# Altium PCB CH32X035G8R-R0-1v1.PcbDoc
Units mil, origin at the board's own origin, x right, y up, seen from the top; angles counter-clockwise.
Board outline 1535.59 x 1780 mil, 2 copper layers (Top Layer, Bottom Layer); 29 components, 40 nets, 147 pads, 149 vias.
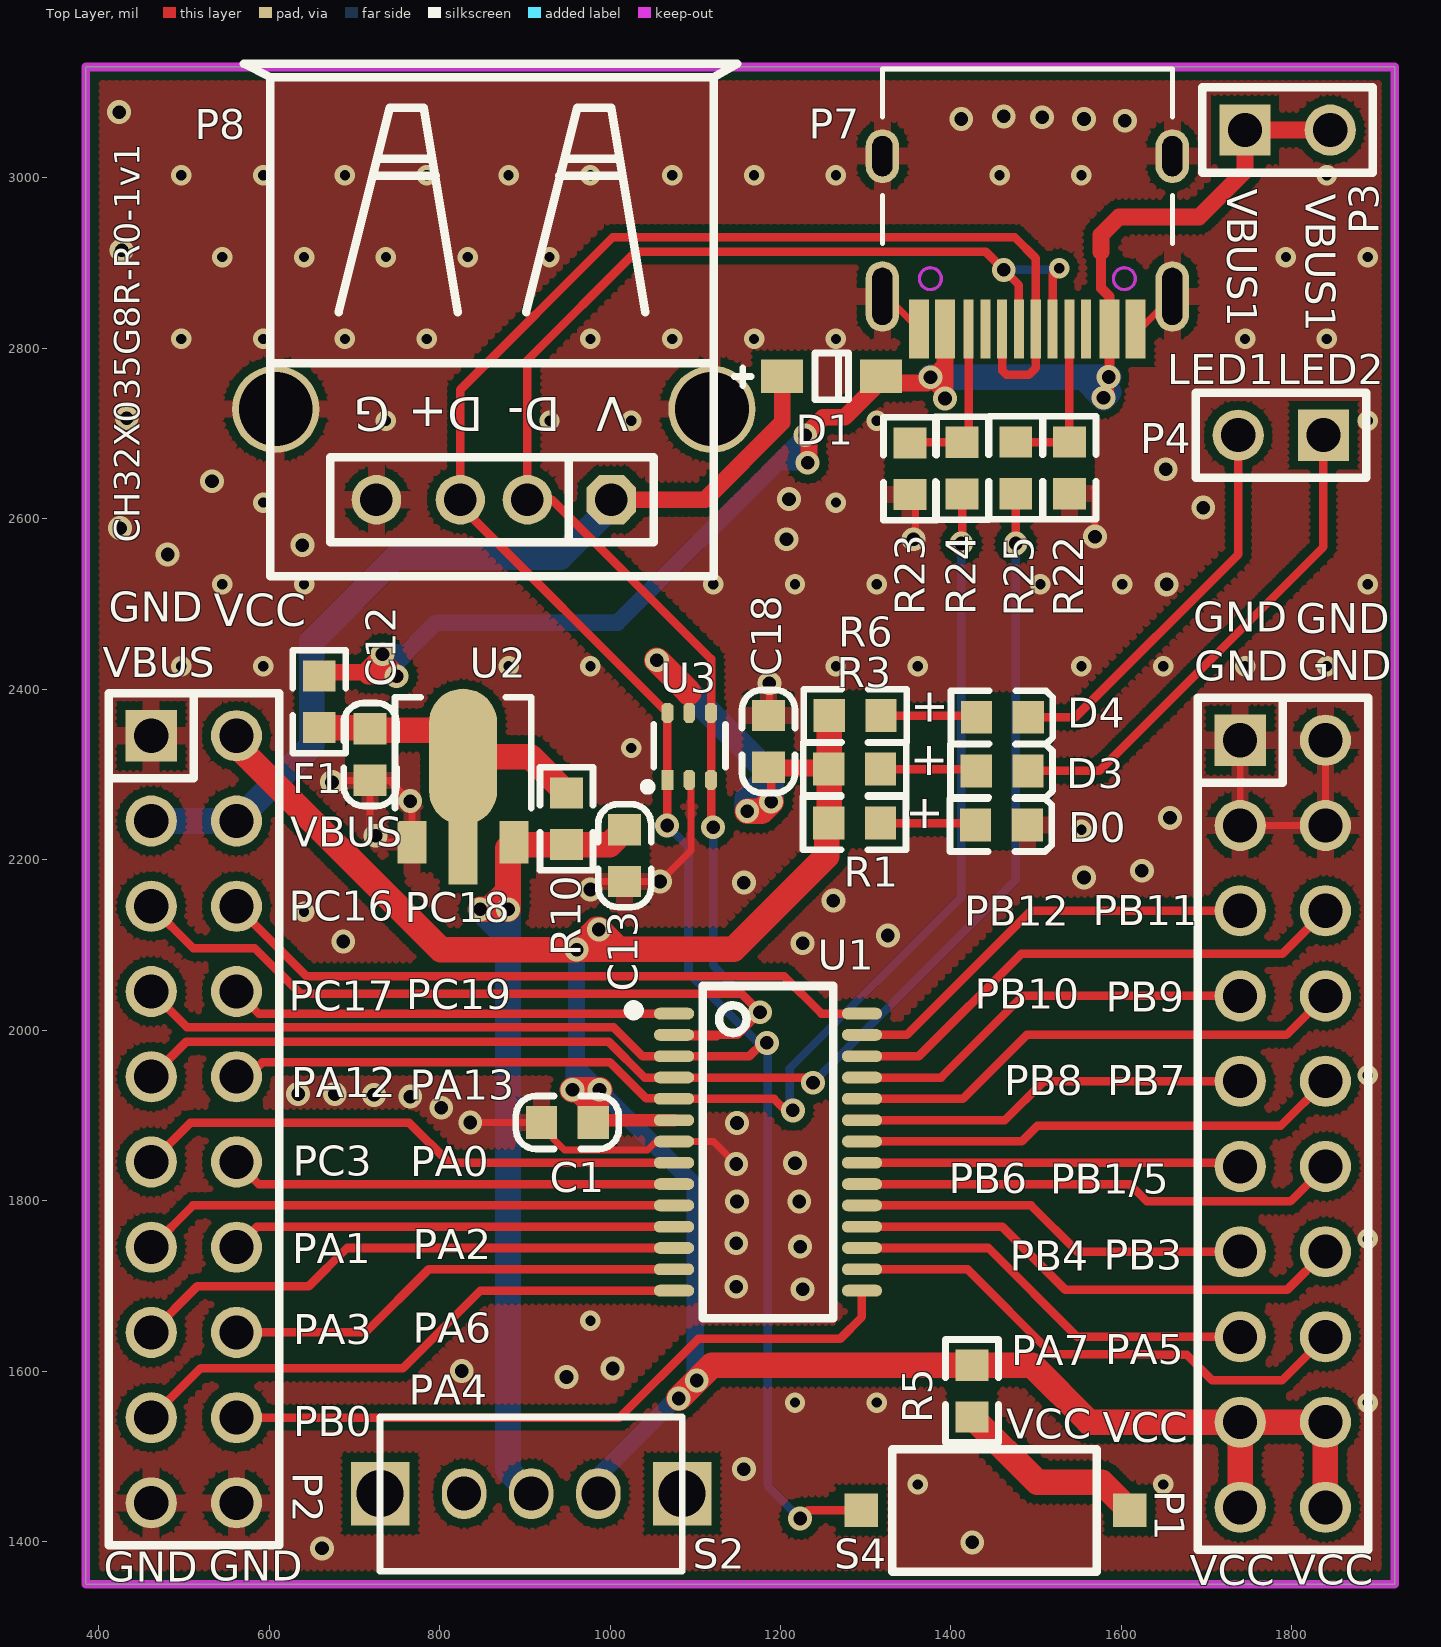
[diagram p0: Top Layer view]
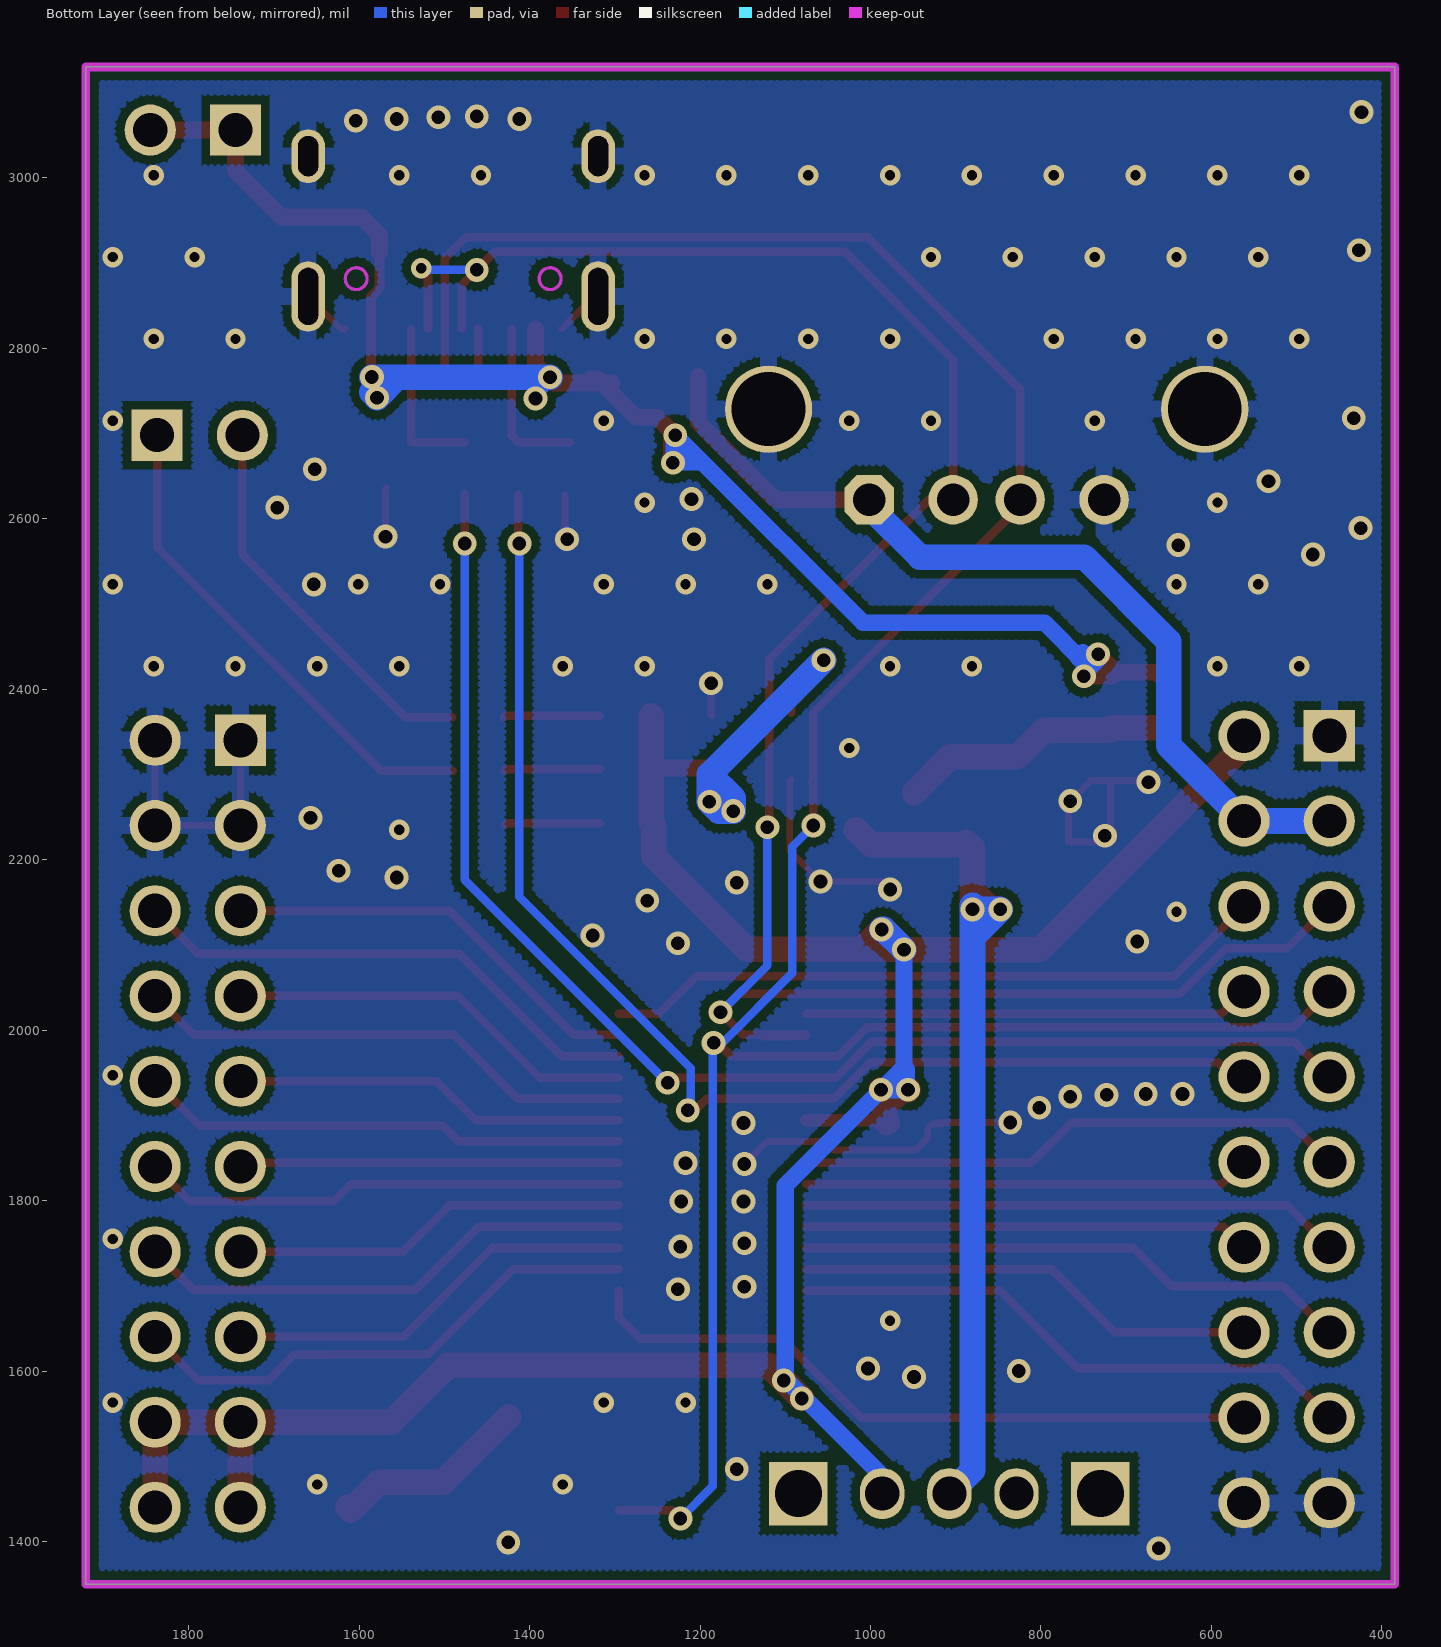
[diagram p1: Bottom Layer view, seen from below]

## Layer stack, top to bottom
Top Solder: solder mask 0.4, Solder Resist, Dk 3.5
Top Layer: signal copper 1.4
Dielectric1: dielectric 12.6, FR-4, Dk 4.8
Bottom Layer: signal copper 1.4
Bottom Solder: solder mask 0.4, Solder Resist, Dk 3.5

## Board outline
385,1350 385,3130 1920.59,3130 1920.59,1350

## Design rules (kind name [scope] priority, off if disabled: settings)
Clearance Clearance_1 [InPolygon] p1: gap=10 ignorepadtopadclearanceinfootprint=FALSE except(0: Arc-Hole Track-Hole SMDPad-Hole THPad-Hole Via-Hole Fill-Hole Poly-Hole Region-Hole Text-Hole)
Clearance [All] p2: gap=6 ignorepadtopadclearanceinfootprint=FALSE except(0: Arc-Hole Track-Hole SMDPad-Hole THPad-Hole Via-Hole Fill-Hole Poly-Hole Region-Hole Text-Hole)
ComponentClearance [All] p1 off: gap=10 collisioncheckmode=3 verticalgap=10 showdistances=FALSE
DiffPairsRouting [All] p1: maxlimit=10 minlimit=7 mostfreqgap=8 toplayer_minwidth=15 toplayer_maxwidth=15 toplayer_prefwidth=15 bottomlayer_minwidth=15 bottomlayer_maxwidth=15 bottomlayer_prefwidth=15 maxuncoupledlength=500
MinimumSolderMaskSliver [All] p1 off: minsoldermaskwidth=10
PolygonConnect PolygonConnect_1 [IsVia] p1: connectstyle=Direct reliefconductorwidth=10 reliefentries=4 polygonreliefangle="90 Angle" airgapwidth=10
PolygonConnect [All] p2: connectstyle=Relief reliefconductorwidth=20 reliefentries=4 polygonreliefangle="90 Angle" airgapwidth=10
RoutingVias [All] p1: holewidth=16 width=28 viastyle="Through Hole" minholewidth=12 minwidth=24 maxholewidth=28 maxwidth=50
SilkToSilkClearance [All] p1 off: silktosilkclearance=10
SilkToSolderMaskClearance [IsPad] p1 off: minsilkscreentomaskgap=10 clearancetoexposedcopper=TRUE
SolderMaskExpansion [All] p1: expansion=2 istentingtop=FALSE
Width [All] p1: maxlimit=100 minlimit=6 preferedwidth=10
25 further rules are at their usual default settings.

## Components (designator, comment, footprint, x,y, rotation, side; value= is the part's Value field where it differs from the comment)
C1 "0.1uF" 0603_C 919.62,1891.67 r0 top
C12 "10uF" 0603_C 718.55,2353.69 r270 top
C13 "10uF" 0603_C 1017.11,2235.05 r270 top
C18 "0.1uF" 0603_C 1186,2369 r270 top
D0 "POWER  red" 0603+ 1428.95,2240.76 r0 top
D1 "Diode" SOD-123 1202,2767 r0 top
D3 "LED2" 0603+ 1429.68,2304.23 r0 top
D4 "LED1" 0603+ 1430.09,2367.05 r0 top
F1 "500mA" 0603 658.89,2415.53 r270 top
P1 "Header 10X2" IDC20-2.54mm 1739.33,2340.1 r0 top
P2 "Header 10X2" IDC20-2.54mm 461.7,2345.36 r0 top
P3 "HEADER 2" SIP2-2.54mm 1745,3056 r270 top
P4 "HEADER 2" SIP2-2.54mm 1837,2698 r90 top
P7 "TYPE-C" TYPE-C-Receptacle-2.0 1489.64,2822.62 r180 top
P8 "USB_A" USBAF 1001.49,2622.27 r180 top
R1 "1K" 0603 1317.17,2242.89 r180 top
R3 "1K" 0603 1256.69,2306.33 r0 top
R5 "4.7K" 0603 1424.67,1606.83 r270 top
R6 "1K" 0603 1257.24,2368.93 r0 top
R10 "NC(0Ω)" 0603 948.87,2217.67 r90 top
R22 "5.1K" 0603 1539,2690 r270 top
R23 "5.1K" 0603 1352,2689 r270 top
R24 "0Ω" 0603 1413,2629 r90 top
R25 "0Ω" 0603 1476,2690 r270 top
S2 "SW" SW1 907.52,1456.19 r0 top
S4 "Download" SMD_6.1x3.65x2.5mm-KEY 1609.61,1436.65 r180 top
U1 "CH32X035G8R6" QSOP28 1075.1,2019.38 r270 top
U2 "HT7533" SOT-89 767.58,2220.63 r0 top
U3 "CH412K" SOT-363 1067.35,2293.48 r0 top

## Footprints (in the part's own frame and the unit in brackets; to place one, negate y for a bottom-side part, rotate by r counter-clockwise, add the part's x,y. Pads: shape width x height; smd on the part's side, far side on the other; paste and mask are expansions set on the pad)
0603 [mm]
  rect 0.93x0.98 smd: 1(0,0) 2(1.54,0)
  silkscreen extent -0.76,-0.79 2.3,0.79
0603+ [mm]
  rect 0.93x0.98 smd: 1(0,0) 2(1.54,0)
  silkscreen extent -0.76,-0.79 2.27,0.79
0603_C [mm]
  rect 0.93x0.98 smd mask+0.051: 1(0,0) 2(1.54,0)
  silkscreen extent -0.76,-0.79 2.31,0.79
IDC20-2.54mm [mil]
  rect 60x60 hole 40: 1(0,0)
  round 60 hole 40: 2(100,0) 3(0,-100) 4(100,-100) 5(0,-200) 6(100,-200) 7(0,-300) 8(100,-300) 9(0,-400) 10(100,-400) 11(0,-500) 12(100,-500) 13(0,-600) 14(100,-600) 15(0,-700) 16(100,-700) 17(0,-800) 18(100,-800) 19(0,-900) 20(100,-900)
  silkscreen extent -50,-950 150,50
QSOP28 [mm]
  oval 0.35x1.2 smd mask+0.051: 1(0,0) 2(0.635,0) 3(1.27,0) 4(1.905,0) 5(2.54,0) 6(3.175,0) 7(3.81,0) 8(4.445,0) 9(5.08,0) 10(5.715,0) 11(6.35,0) 12(6.985,0) 13(7.62,0) 14(8.255,0) 15(8.255,5.6) 16(7.62,5.6) 17(6.985,5.6) 18(6.35,5.6) 19(5.715,5.6) 20(5.08,5.6) 21(4.445,5.6) 22(3.81,5.6) 23(3.175,5.6) 24(2.54,5.6) 25(1.905,5.6) 26(1.27,5.6) 27(0.635,5.6) 28(0,5.6)
  silkscreen extent -0.82,-1.35 9.08,4.75
SIP2-2.54mm [mil]
  rect 60x60 hole 40: 1(0,0)
  round 60 hole 40: 2(0,100)
  silkscreen extent -50,-50 50,150
SMD_6.1x3.65x2.5mm-KEY [mm]
  rect 1x1 smd: 1(0,0) 2(8,0)
  silkscreen extent 0.98,-1.83 7.08,1.83
SOD-123 [mm]
  rect 1.25x1 smd: 1(0,0) 2(2.95,0)
  silkscreen extent -1.43,-0.7 1.97,0.7
SOT-89 [mil]
  rect 34x50 smd: 1(0,0) 3(120,0)
  rect 34x100 smd: 2(60,0)
  oval 80x160 smd: ""(60,100)
  silkscreen extent -20,40 140,170
SOT-363 [mm]
  rect 0.35x0.6 smd mask+0.051: 1(0,0)
  oct 0.35x0.6 smd mask+0.051: 2(0.65,0) 3(1.3,0) 4(1.3,2) 5(0.65,2) 6(0,2)
  silkscreen extent -0.7,-0.31 1.73,1.65
SW1 [mm]
  rect 1.75x1.9 hole 1.4: 0(-4.5,0) 0(4.5,0)
  oval 1.321x1.524 hole 1.016: 1(0,0) 2(-2,0) 3(2,0)
  silkscreen extent -4.51,-2.31 4.5,2.29
TYPE-C-Receptacle-2.0 [mm]
  oval 1x2.1 hole 0.6 slot 1.7 at 90 deg: 0(-4.32,-0.97) 0(4.32,-0.97)
  oval 1x1.6 hole 0.6 slot 1.2 at 90 deg: 0(-4.32,-5.15) 0(4.32,-5.15)
  rect 0.6x1.75 smd mask+0.051: A1(-3.225,0) A4(-2.45,0) B1(3.225,0) B4(2.45,0)
  rect 0.3x1.75 smd mask+0.051: A5(-1.25,0) A6(-0.25,0) A7(0.25,0) A8(1.25,0) B5(1.75,0) B6(0.75,0) B7(-0.75,0) B8(-1.75,0)
  Keep-Out Layer circle w0.1: c2.89,-1.5 r0.325
  Keep-Out Layer circle w0.1: c-2.89,-1.5 r0.325
  silkscreen extent -4.32,-7.75 4.32,-2.55
USBAF [mm]
  round 2.6 hole 2.2: 0(-3,-2.7) 0(10,-2.7)
  oct 1.473x1.473 hole 0.965: 1(0,0)
  round 1.473 hole 0.965: 2(2.5,0) 3(4.5,0) 4(7,0)
  silkscreen extent -3.75,-12.99 10.95,2.29

## Part data
C1 C12 C13: library part CAP, "Capacitor"
C18: library part Cap, "Capacitor"
D0 D3 D4: library part LED0, "Typical INFRARED GaAs LED"
D1: "Default Diode"
F1: library part FUSE1, "Fuse"
P1 P2: "Header, 10-Pin, Dual row"
P3 P4: "Header, 2-Pin"
P7: library part TYPE-C1
P8: library part USB, "USB Port"
R1 R3 R6: library part "Res Semi", "Semiconductor Resistor"
R5 R10 R22 R23 R24 R25: library part Res2, "Resistor"
S4: library part KEY1
U1: "RISC-V MCU with USB/PD/ADC/SPI/I2C/UART/OA/CMP"
U2: library part 1117-3.3V
U3: "Qaud ESD protect, high speed"

## Via types
v1: diameter 28, hole 16, Top Layer to Bottom Layer, tented both sides, 83 vias
v2: diameter 24, hole 12, Top Layer to Bottom Layer, tented both sides, 66 vias

## Nets (pads, with @x,y where several pads share a name; then routed paths per layer and width w, separated by ;. In a path a pad name is that pad's centre, name@x,y a point inside that pad or via, vN(x,y) a via of type N, cw(c..) or ccw(c..) an arc to the next point about the centre after c; other vN are vias at no path point)
5V: C12.1 F1.2 R10.2 U2. U2.2 | length 321.7
  Top Layer w30: F1.2 717.34,2354.9 C12.1 720.34,2351.9 796.31,2351.9 U2. 906.54,2320.63 R10.2
CC1: P2.9 R25.2 U1.4 | length 1602.9
  Top Layer w10: P2.9 502.7,1986.36 998.51,1986.36 1040.49,1944.38 U1.4 1232.01,1944.38 v1(1238.07,1938.32) ; v1(1476,2571) R25.2
  Bottom Layer w10: v1(1238.07,1938.32) 1476,2176.24 v1(1476,2571)
CC2: P2.10 R24.1 U1.5 | length 1491.4
  Top Layer w10: P2.10 575.23,1945.36 592.26,1962.39 999.85,1962.39 1042.24,1920 1074.48,1920 U1.5 1192.41,1919.38 1205.88,1905.92 v1(1214.48,1905.92) ; v1(1412,2571) 1413,2572 R24.1
  Bottom Layer w10: v1(1214.48,1905.92) 1211.07,1909.33 1211.07,1955.46 1412,2156.38 v1(1412,2571)
GND: C1.1 C12.2 C13.2 C18.1 D0.2 P1.1 P1.2 P1.3 P1.4 P2.1 P2.19 P2.20 P7.0 P7.A1 P7.B1 P8.0 P8.4 R22.2 R23.2 U1.7 U2.1 U3.2 | length 1425.3
  Top Layer w8: v1(673.79,2291.04) 675.81,2293.06 C12.2 ; v1(836,1891.67) C1.1@914.33,1891.67 ; C1.1 C1.1@914.33,1891.67 ; v1(977,2165) 986.42,2174.42 C13.2 v1(1058.61,2174.42) 1094.81,2210.62 1094.81,2291.61 U3.2 ; v1(1148,1843) 1121.62,1869.38 U1.7 1053.79,1869.38 1043.86,1859.45 946.55,1859.45 932.93,1873.06 932.93,1884.38 927.28,1890.03 915.97,1890.03 C1.1@914.33,1891.67 ; C18.1 1187,2370 v1(1187,2407) ; P7.0@1319.56,2860.81 1324.48,2860.81 P7.B1 ; v1(1356,2576) 1358.46,2578.46 R23.2@1358.46,2627.89 ; 1567.66,2636.18 1569,2634.83 v1(1569,2579) ; P7.A1 1621.53,2822.62 P7.0@1659.72,2860.81 ; P1.1 P1.3 P1.4 P1.2 ; C12.2 741.13,2293.06 v1(765.58,2268.62) 767.58,2266.62 U2.1 732.37,2220.63 v1(725,2228) 718.55,2234.45 C12.2
  Bottom Layer w8: v1@827,1894 829.33,1891.67 v1(836,1891.67) ; v1(1356,2576) v1@1356,2586.84
  other v1: 662,1392 1425,1399 1157,1485 949,1593 826,1600 1003,1603 1226,1696 1148,1699 1223,1746 1148,1750 1149,1799 1222,1799 1217,1844 1149,1891 802,1909 765.58,1922 723,1924 634,1925 677,1925 1226,2102 687,2104 1326,2111 1262,2152 1157,2173 1556,2179 1624,2187 1657,2249 1653,2523 481,2558 639,2569 1207,2576 425,2589 1696,2613 1210,2623 533,2644 1652,2658 433,2718 427,2915 1604,3067 1412,3069 1556,3069 1507,3071 1462,3072 424,3077
  other v2: 1361,1467 1649,1467 1217,1563 1313,1563 1889,1563 977,1659 1889,1755 1889,1947 641,2139 1553,2235 1025,2331 497,2427 593,2427 881,2427 977,2427 1265,2427 1361,2427 1553,2427 1649,2427 1745,2427 1841,2427 545,2523 641,2523 1121,2523 1217,2523 1313,2523 1505,2523 1601,2523 1889,2523 593,2619 1265,2619 737,2715 929,2715 1025,2715 1313,2715 1889,2715 497,2811 593,2811 689,2811 785,2811 977,2811 1073,2811 1169,2811 1265,2811 1745,2811 1841,2811 545,2907 641,2907 737,2907 833,2907 929,2907 1793,2907 1889,2907 497,3003 593,3003 689,3003 785,3003 881,3003 977,3003 1073,3003 1169,3003 1265,3003 1457,3003 1553,3003 1841,3003
LED1: D4.2 P4.2 | length 465.3
  Top Layer w10: D4.2 1545.9,2367.05 1737,2558.15 P4.2
LED2: D3.2 P4.1 | length 586.5
  Top Layer w10: D3.2 1574.23,2304.23 1837,2567 P4.1
NetC13_1: C13.1 R10.1 S2.1 U2.3 | length 1063.3
  Top Layer w30: v1(847.61,2141.72) v1@858.78,2141.72 ; C13.1 999.74,2217.67 R10.1 890.54,2217.67 U2.3 880.32,2213.37 880.32,2163.26 ; v1@858.78,2141.72 880.32,2163.26 ; v1@858.78,2141.72 v1(880.32,2141.72) 880.32,2163.26
  Bottom Layer w30: v1@880.32,2146.24 v1(880.32,2141.72) ; S2.1 880.32,1483.39 880.32,2109.01 ; 880.32,2109.01 v1(847.61,2141.72) v1(880.32,2141.72) ; 880.32,2109.01 v1(880.32,2141.72)
NetD0_1: D0.1 R1.1 | length 112.7
  Top Layer w10: R1.1 1426.82,2242.89 D0.1
NetD3_1: D3.1 R3.2 | length 113.2
  Top Layer w10: R3.2 1427.58,2306.33 D3.1
NetD4_1: D4.1 R6.2 | length 113
  Top Layer w10: R6.2 1428.21,2368.93 D4.1
NetP7_A5: P7.A5 R22.1 R25.1 | length 195.7
  Top Layer w10: R25.1 R22.1 1538.85,2690.15 P7.A5
NetP7_B5: P7.B5 R23.1 R24.2 | length 197.5
  Top Layer w10: R23.1 1352.63,2689.63 R24.2 1420.74,2697.37 P7.B5
NetR5_2: R5.2 S4.1 | length 235.5
  Top Layer w30: R5.2 1501.37,1469.5 1576.75,1469.5 S4.1 S4.1@1613.29,1440.34
PA0: P2.12 U1.9 | length 524.2
  Top Layer w10: P2.12 587.68,1819.38 U1.9
PA1: P2.13 U1.10 | length 633.7
  Top Layer w10: P2.13 510.72,1794.38 U1.10
PA2: P2.14 U1.11 | length 523.4
  Top Layer w10: P2.14 585.72,1769.38 U1.11
PA3: P2.15 U1.12 | length 654.4
  Top Layer w10: P2.15 515.76,1699.41 646.56,1699.41 691.53,1744.38 U1.12
PA4: P2.18 U1.15 | length 813.6
  Top Layer w10: P2.18 1011.04,1545.36 1103.68,1638 1270,1638 1295.58,1663.58 U1.15
PA5: P1.16 U1.16 | length 618.9
  Top Layer w10: U1.16 1419.45,1719.38 1519.29,1619.55 1635.18,1619.55 1635.45,1619.28 1676.34,1619.28 1706.54,1589.08 1788.31,1589.08 P1.16
PA6: P2.16 U1.13 | length 544.1
  Top Layer w10: P2.16 713.26,1645.36 787.28,1719.38 U1.13
PA7: P1.15 U1.17 | length 486.9
  Top Layer w10: U1.17 1443.94,1744.38 1548.22,1640.1 P1.15
PB0: P2.17 U1.14 | length 675.1
  Top Layer w10: P2.17 519.64,1603.3 756.91,1603.3 847.99,1694.38 U1.14
PB1/PB5: P1.12 U1.20 | length 569.2
  Top Layer w10: U1.20 1609.59,1819.38 1629.97,1799 1798.23,1799 P1.12
PB3: P1.14 U1.18 | length 593
  Top Layer w10: U1.18 1460.09,1769.38 1534.13,1695.34 1794.56,1695.34 P1.14
PB4: P1.13 U1.19 | length 466.2
  Top Layer w10: U1.19 1493.95,1794.38 1548.23,1740.1 P1.13
PB6: P1.11 U1.21 | length 445.5
  Top Layer w10: U1.21 1735.05,1844.38 P1.11
PB7: P1.10 U1.22 | length 573
  Top Layer w10: U1.22 1483.13,1869.38 1501.3,1887.55 1786.77,1887.55 P1.10
PB8: P1.9 U1.23 | length 462.7
  Top Layer w10: U1.23 1463.34,1894.38 1509.06,1940.1 P1.9
PB9: P1.8 U1.24 | length 593.8
  Top Layer w10: U1.24 1413.85,1919.38 1488.81,1994.34 1793.57,1994.34 P1.8
PB10: P1.7 U1.25 | length 483.4
  Top Layer w10: U1.25 1388.32,1944.38 1484.04,2040.1 P1.7
PB11: P1.6 U1.26 | length 614.5
  Top Layer w10: U1.26 1362.27,1969.38 1482.56,2089.66 1788.89,2089.66 P1.6
PB12: P1.5 U1.27 | length 504.1
  Top Layer w10: U1.27 1348.21,1994.38 1493.93,2140.1 P1.5
PC3: P2.11 U1.8 | length 651.8
  Top Layer w10: P2.11 507.55,1891.21 764.48,1891.21 811.31,1844.38 U1.8
PC16: P2.5 P7.A7 P7.B7 P8.2 U1.2 U3.3 U3.4 | length 2660.9
  Top Layer w10: P2.5 511.15,2095.91 583.43,2095.91 636.74,2042.61 1154.39,2042.61 v1(1176,2021) 1149.38,1994.38 U1.2 1075.83,1993.66 1095.23,1993.66 1095.79,1993.1 1125.26,1993.1 ; v1(1121,2238) 1118.53,2240.47 U3.3 U3.4 1118.53,2435.47 931.73,2622.27 P8.2 903.07,2786.07 1030.15,2913.15 1440.85,2913.15 v1(1462,2892) 1479.8,2874.2 P7.A7 ; P7.B7 1519.17,2886.17 v2(1527,2894)
  Bottom Layer w10: v1(1121,2238) 1121,2076 v1(1176,2021) ; v1(1462,2892) 1525,2892 v2(1527,2894)
PC17: P2.7 P7.A6 P7.B6 P8.3 S4.2 U1.3 U3.1 U3.6 | length 3323
  Top Layer w10: P2.7 503.68,2003.38 1004.12,2003.38 1038.12,1969.38 U1.3 1163.38,1969.38 1179,1985 v1(1184,1985) ; v1(1067,2240.1) 1067,2290.21 1068.81,2292.02 U3.1 U3.6 824.33,2615.24 P8.3 824.33,2751.33 1003,2930 1475,2930 1499.48,2905.52 P7.A6 1499.48,2777 1491.48,2769 1465,2769 1460.11,2773.89 P7.B6 ; v1(1223,1427) 1232.65,1436.65 S4.2
  Bottom Layer w10: P8.3@824.33,2613.37 P8.3 ; v1(1067,2240.1) 1092.07,2215.04 1092.07,2066.75 1173.82,1985 v1(1184,1985) 1185,1984 1185,1465 v1(1223,1427)
PC18: P2.6 U1.28 | length 786.1
  Top Layer w10: P2.6 643.83,2063.23 1204.2,2063.23 1248.05,2019.38 U1.28
PC19: P2.8 U1.1 | length 524.2
  Top Layer w10: P2.8 587.68,2019.38 U1.1
VBUS: D1.1 P2.3 P2.4 P8.1 | length 1057.2
  Top Layer w19.68: P8.1 1111.27,2622.27 1202,2713 D1.1
  Bottom Layer w30: P2.3 P2.4 650,2333.66 650,2456 749,2555 942,2555 P8.1@1002,2615
VBUS1: D1.2 F1.1 P3.1 P3.2 P7.A4 P7.B4 | length 2223.7
  Top Layer w12: 1576.13,2913 1576.13,2870.37 1586.09,2860.41 P7.A4 1586.09,2767.31 v1(1585,2766.21) 1585,2748 v1(1579,2742)
  Top Layer w19.68: F1.1@657,2412 665,2420 748,2420 733,2435 v1(733,2441) ; 712,2420 v1(733,2441) ; 714,2417 715.73,2415.27 v1(749.64,2415.27) 731.73,2415.27 726,2421 ; v1@733,2432 v1(733,2441) ; v1(1229,2698) v1@1233.44,2702.44 ; v1(1231.85,2665.71) 1233.44,2667.3 v1@1233.44,2702.44 ; D1.2@1328,2764 1320,2764 1275,2719 1250,2719 v1@1233.44,2702.44
  Top Layer w20: D1.2@1303.14,2759 1372,2759 v1@1377.5,2764.5 ; v1(1376,2766) v1@1377.5,2764.5 ; P7.B4 1393.18,2780.18 1393,2780 ; 1576.13,2913 1576.13,2932.87 1597.26,2954 1691,2954 1745,3008 P3.1 P3.2 ; v1@1377.5,2764.5 1393,2749 1393,2780 ; v1@1377.5,2764.5 1393,2780
  Bottom Layer w12: v1(1376,2766) v1@1376.21,2766.21 ; 1556,2766.21 v1(1585,2766.21) 1585,2748.5 1585,2748 v1(1579,2742)
  Bottom Layer w19.68: v1@731,2437 v1@752.64,2415.36 ; v1(749.64,2415.27) 749.64,2430.64 757,2438 ; 751,2443 749,2441 v1(733,2441) 746,2428 796,2478 1009,2478 1197.5,2666.5 ; v1@1228,2697 1197.5,2666.5 ; v1(1229,2698) 1230.43,2696.57 1230.43,2667.14 v1@1231.06,2666.5 ; v1(1231.85,2665.71) v1@1231.06,2666.5 ; v1@1379,2763 v1@1380,2764 ; 1197.5,2666.5 v1@1231.06,2666.5
  Bottom Layer w20: v1(1376,2766) 1393,2749 v1(1393,2741)
  Bottom Layer w30: v1(1376,2766) 1556,2766 ; 1556,2766.21 1556,2766 ; v1(1579,2742) v1@1578.75,2742.25 ; v1@1585,2748.5 v1@1578.75,2742.25 ; v1(1585,2766.21) 1584.79,2766 1556,2766 ; 1556,2766 1556,2765 v1@1578.75,2742.25
VCC: C1.2 C18.2 P1.17 P1.18 P1.19 P1.20 P2.2 R1.2 R3.1 R5.1 R6.1 S2.3 U1.6 U3.5 | length 3660.5
  Top Layer w10: 1092.53,2396.47 1092.94,2396.06 U3.5 ; C18.2@1186,2307.37 1189,2304.37 v1(1189,2268) ; R3.1@1255.65,2307.37 R3.1
  Top Layer w15: C1.2@994,1894.38 U1.6
  Top Layer w20: C18.2@1186,2307.37 R3.1@1255.65,2307.37
  Top Layer w30: P2.2 561.7,2334.03 801.26,2094.47 v1(960.77,2094.47) ; v1(956,1930) v1@964.01,1930 ; v1@961.94,2095.64 984.44,2118.14 v1(986.95,2118.14) 1010,2095.09 ; v1@962.48,2095.09 1010,2095.09 ; C1.2 983.55,1894.98 C1.2@983.55,1910.45 ; v1(987.63,1930) v1@983.55,1925.93 ; v1(1055,2434) 1092.53,2396.47 1092.53,2396.06 ; v1(1080.69,1567.86) 1119.66,1606.83 R5.1 1495.23,1606.83 1561.96,1540.1 P1.17 ; v1(1161,2257) 1178,2257 v1(1189,2268) ; R1.2 1254.09,2240.44 1254.09,2204.09 1145.09,2095.09 1010,2095.09 ; R1.2@1257.24,2243.59 R6.1 ; P1.19 P1.17 ; P1.20 P1.18 P1.17 ; v1@964.01,1930 C1.2@983.55,1910.45 ; v1@964.01,1930 979.48,1930 v1@983.55,1925.93 ; C1.2@983.55,1910.45 v1@983.55,1925.93
  Bottom Layer w20: v1(960.77,2094.47) 960.77,1956.86 ; S2.3 986.26,1476.96 1100.18,1590.87 1100.18,1596.12 1100,1596.29 1100,1817.63 960.77,1956.86 ; v1(986.95,2118.14) v1@986.95,2120.3 ; v1(987.63,1930) v1(956,1930) 957.53,1931.53 957.53,1953.62 960.77,1956.86
  Bottom Layer w30: v1(960.77,2094.47) 984.44,2118.14 v1(986.95,2118.14) ; v1(1055,2434) 1189,2300 ; v1(1161,2257) 1161,2272 1189,2300 ; v1@1189,2280 v1(1189,2268) 1178,2257 1166,2257 v1@1189,2280 ; v1@1189,2280 1189,2300
  other v1: 1101.71,1588.93
pads on no net: P7.A8 P7.B8 S2.0 S2.2

## Polygon pours and split planes (outlines as drawn)
GND on Bottom Layer "Top Layer-No Net" (hatched 90Degree grid 8 track 8, remove dead copper, pour order 0): 388,3126 397,3135 1920,3135 1920,1362 1908,1350 1906,1348 381,1348 381,3123 386,3128
GND on Top Layer "Top Layer-No Net" (hatched 90Degree grid 8 track 8, remove dead copper, pour order 1): 381,3135 1920,3135 1920,1350 1913,1343 1904,1352 384,1352 384,3123 370,3137 374,3141 374,3142

## Keep-outs
Keep-Out Layer:
  the board outline again, w10

## Silkscreen, mask and mechanical layers (free items; w line width, h text height)
Top Overlay:
  text "VBUS1" at 1724,2987 h35 r270
  text "VBUS1" at 1816.29,2981.46 h35 r270
  text "LED1" at 1654,2758 h35
  text "LED2" at 1783,2758 h35
  text "CH32X035G8R-R0-1v1" at 448,2572 h30 r90
  text "GND" at 412,2479 h35
  text "VCC" at 535,2474 h38
  text "GND" at 1684.13,2467.57 h35
  text "GND" at 1804.51,2465.79 h35
  text "VBUS" at 405,2414 h35
  text "GND" at 1685.31,2409.73 h35
  text "GND" at 1806.88,2410.32 h35
  text "VBUS" at 625,2215 h35
  text "PC16" at 623.07,2128.35 h35
  text "PC18" at 759.39,2126.83 h35
  text "PB12" at 1415.42,2122.72 h35
  text "PB11" at 1566.46,2122.81 h35
  text "PB10" at 1428.14,2025.28 h35
  text "PC19" at 760.9,2024.39 h35
  text "PC17" at 623.07,2022.9 h35
  text "PB9" at 1581.33,2021.42 h35
  text "PB8" at 1462.31,1923.89 h35
  text "PB7" at 1583.54,1923.34 h35
  text "PA12" at 625.7,1921.44 h35
  text "PA13" at 764.81,1918.36 h35
  text "PC3" at 628,1829.21 h35
  text "PA0" at 765.59,1828.44 h35
  text "PB6" at 1397.28,1808.72 h35
  text "PB1/5" at 1516.31,1808.17 h35
  text "PA2" at 768.69,1730.91 h35
  text "PA1" at 627.14,1726.23 h35
  text "PB3" at 1579.13,1718.9 h35
  text "PB4" at 1468.67,1717.82 h35
  text "PA6" at 768.69,1633.43 h35
  text "PA3" at 628.08,1631.55 h35
  text "PA5" at 1580.77,1608.13 h35
  text "PA7" at 1471,1607 h35
  text "PA4" at 764,1560.31 h35
  text "PB0" at 628.08,1523.75 h35
  text "VCC" at 1464.57,1520.85 h35
  text "VCC" at 1578.16,1516.42 h35
  text "GND" at 529,1354 h35
  text "GND" at 406,1353 h35
  text "VCC" at 1795.59,1349.56 h35
  text "VCC" at 1680.22,1348.68 h35
Mechanical 1:
  the board outline again, w10

## Text inside footprints (layer, text, board x,y; h text height)
D0: Top Overlay "+" at 1386.38,2231.13 h40 r90
D3: Top Overlay "+" at 1391.6,2293.24 h40 r90
D4: Top Overlay "+" at 1392.02,2356.06 h40 r90
P8: Top Overlay "D-" at 941.49,2742.27 h40 r180; Top Overlay "D+" at 851.49,2742.27 h40 r180; Top Overlay "V" at 1021.49,2742.27 h40 r180; Top Overlay "G" at 741.49,2742.27 h40 r180